# EAGLE board aspirin-teardrops (EAGLE 6.1)
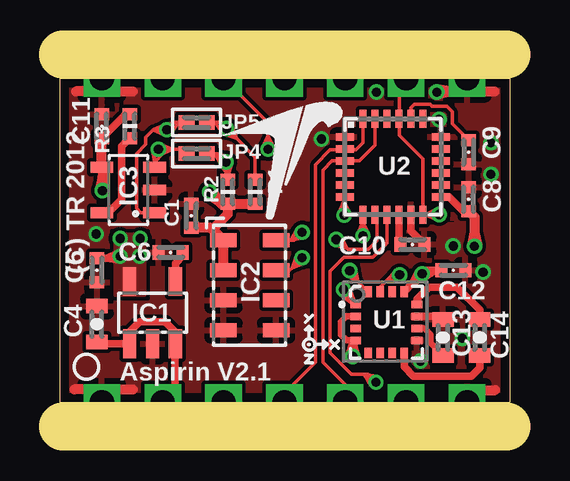
[diagram p0: board, top side]
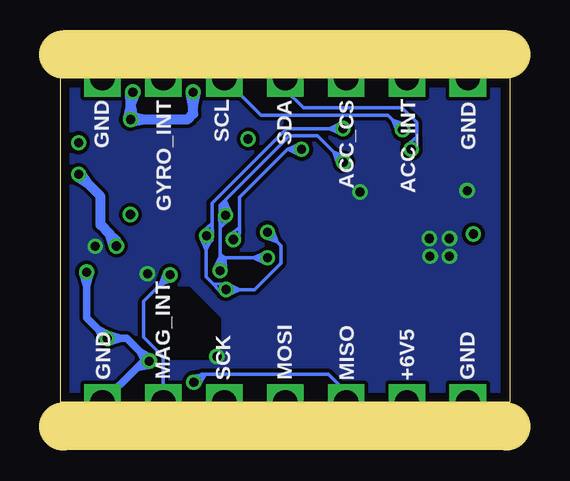
[diagram p1: board, bottom side, seen from below]

Size 18.75 x 13.5 mm. Coordinates in mm from the lower left corner, seen from the top.
Outline: 0,13.5 0,0 18.75,0 18.75,13.5 0,13.5
Copper layers (1*2+15*16): Top 0.035mm / dielectric 0.2mm / Route2 0.035mm / dielectric 1.5mm / Route15 0.035mm / dielectric 0.2mm / Bottom 0.035mm
Design rules: minimum track width 0.15mm, minimum drill 15mil, track to track 6mil, track to pad 6mil, pad to pad 6mil, via to via 6mil, smd to smd 6mil, copper to edge 15mil, drill to drill 8mil, minimum pad ring 5mil, minimum via ring 5mil, stop-mask expansion 4mil, vias tented up to drill 0.4mm, thermal gap 10mil
tRestrict: area 16.3,7.5 to 16.4,7.5; area 12.5,8.4 to 15.3,11.2; area 10,11.8 to 10,11.9; area 12.6,2.3 to 14.6,4.3
bRestrict: area 15.8,0.8 to 15.9,0.8; area 12.1,1.8 to 15,4.7
vRestrict: area 12.8,2.3 to 14.7,4.3
Milling: 2 lines

## Footprints (pad centres in the part's own frame; a part is rotated, then mirrored left to right if it is on the bottom)
ASPIRIN_CASTELLATED = drill 1.016 square: 1 0,0; 2 2.54,0; 3 5.08,0; 4 7.62,0; 5 10.16,0; 6 12.7,0; 7 15.24,0; 8 15.24,13.5; 9 12.7,13.5; 10 10.16,13.5; 11 7.62,13.5; 12 5.08,13.5; 13 2.54,13.5; 14 0,13.5
0402-CAP = smd 0.5 x 0.6: P$1 -0.5,0; P$2 0.5,0
0603-CAP = smd 0.6 x 0.9: P$1 -0.75,0; P$2 0.75,0
SOT23-5 = smd 0.55 x 1.2: 1 -0.95,-1.3; 2 0,-1.3; 3 0.95,-1.3; 4 0.95,1.3; 5 -0.95,1.3
QFN-MS5611 = smd 1.1 x 0.6: 1 -1.1,1.875; 2 -1.1,0.625; 3 -1.1,-0.625; 4 -1.1,-1.875; 5 1.1,-1.875; 6 1.1,-0.625; 7 1.1,0.625; 8 1.1,1.875
SOT23-5' = smd 0.45 x 0.95: 1 0.95,1.1; 2 0,1.1; 3 -0.95,1.1; 4 -0.95,-1.1; 5 0.95,-1.1
0402-SQJMP = smd 0.652 x 0.6: P$1 -0.424,0; P$2 0.424,0
0402-RES = smd 0.5 x 0.6: P$1 -0.5,0; P$2 0.5,0
PLCC16-HMC5883 = smd 0.45 x 0.3: 1 -1.275,0.75; 2 -1.275,0.25; 3 -1.275,-0.25; 4 -1.275,-0.75; 9 1.275,-0.75; 10 1.275,-0.25; 11 1.275,0.25; 12 1.275,0.75 | smd 0.3 x 0.45: 5 -0.75,-1.275; 6 -0.25,-1.275; 7 0.25,-1.275; 8 0.75,-1.275; 13 0.75,1.275; 14 0.25,1.275; 15 -0.25,1.275; 16 -0.75,1.275
QFN24-NO-PAD = smd 0.75 x 0.3: 1 -2,1.25; 2 -2,0.75; 3 -2,0.25; 4 -2,-0.25; 5 -2,-0.75; 6 -2,-1.25; 13 2,-1.25; 14 2,-0.75; 15 2,-0.25; 16 2,0.25; 17 2,0.75; 18 2,1.25 | smd 0.3 x 0.75: 7 -1.25,-2; 8 -0.75,-2; 9 -0.25,-2; 10 0.25,-2; 11 0.75,-2; 12 1.25,-2; 19 1.25,2; 20 0.75,2; 21 0.25,2; 22 -0.25,2; 23 -0.75,2; 24 -1.25,2

## Placement (x,y rotation side)
ASP1  ASPIRIN  [ASPIRIN_CASTELLATED]  1.74,0 0 top
C1  100n  [0402-CAP]  5.48,7.77 90 top
C4  2.2uF/Low ESR  [0603-CAP]  1.54,3.26 90 top
C5  4.7uF/10V/Low ESR  [0402-CAP]  1.54,5.49 270 top
C6  10nF  [0402-CAP]  4.62,6.25 0 top
C8  100n  [0402-CAP]  17.04,8.47 90 top
C9  2n2  [0402-CAP]  17.04,10.42 270 top
C10  100n  [0402-CAP]  14.71,6.58 0 top
C11  100n  [0402-CAP]  1.74,11.51 90 top
C12  100n  [0402-CAP]  16.41,5.5 0 top
C13  4.7uF/10V/Low ESR  [0603-CAP]  15.98,2.7 90 top
C14  220n/Low ESR  [0603-CAP]  17.5,2.7 270 top
IC1  LP2992  [SOT23-5]  3.86,3.73 0 top
IC2  MS5611  [QFN-MS5611]  7.92,4.88 0 top
IC3  >4KBIT SERIAL EEPROM HALF PROTECT  [SOT23-5']  2.85,8.85 270 top
JP4  0/DNP  [0402-SQJMP]  5.71,10.36 0 top
JP5  0/DNP  [0402-SQJMP]  5.71,11.66 0 top
R1  4k7  [0402-RES]  8.14,8.76 90 top
R2  4k7  [0402-RES]  7,8.76 90 top
R3  4k7  [0402-RES]  2.91,11.51 90 top
U1  HMC5883  [PLCC16-HMC5883]  13.61,3.33 0 top
U2  MPU-6000  [QFN24-NO-PAD]  13.88,9.8 0 top
U$1  TR-LOGO  [TR-LOGO]  9.29,10.06 0 top

## Library data of the parts
ASP1 = aspirin; PARTNO: pcb-aspirin
C1 C8 C10-C12 = pel_dipol_comp; PARTNO: cap-cer-0402-100n
C4 = pel_dipol_comp; PARTNO: cap-cer-0603-2u2
C5 = pel_dipol_comp; PARTNO: cap-cer-0402-4n7
C6 = pel_dipol_comp; PARTNO: cap-cer-0402-10n
C9 = pel_dipol_comp; PARTNO: cap-cer-0402-2n2
C13 = pel_dipol_comp; PARTNO: cap-cer-0603-4n7
C14 = pel_dipol_comp; PARTNO: cap-cer-0603-220n
IC1 = v-reg-micrel; PARTNO: vreg-sot-23-5-3v3
IC2 = aspirin; PARTNO: sensr-qfn-8-baro
IC3 = aspirin; PARTNO: ic-sot-23-5-4k-eeprom
JP4 JP5 = pel_jumpers; DNP: T; PARTNO: res-0402-0
R1-R3 = pel_dipol_comp; PARTNO: res-0402-4k7
U1 = aspirin; PARTNO: sensr-plcc-16-mag
U2 = aspirin; PARTNO: sensr-qfn-24-acc-gyro
U$1 = quadshot; BOM: EXCLUDE; PARTNO: *

## Nets
+3V3: C1.P$1 C5.P$1 C8.P$1 C11.P$1 C12.P$1 IC1.5 IC2.1 IC2.2 IC3.4 R1.P$1 R2.P$1 R3.P$2 U1.2 U1.4 U1.13 U2.13
+6V5: ASP1.2 C4.P$1 IC1.1 IC1.3
ACC_CS: ASP1.12 U2.8
GND: ASP1.1 ASP1.7 ASP1.8 ASP1.14 C1.P$2 C4.P$2 C5.P$2 C6.P$1 C8.P$2 C9.P$2 C10.P$2 C11.P$2 C12.P$2 C13.P$2 IC1.2 IC2.3 IC2.4 IC2.5 IC3.2 U1.9 U1.11 U2.1 U2.11 U2.18
GYRO_INT: ASP1.9 U2.12
MAG_INT: ASP1.6 U1.15
MISO: ASP1.3 U2.9
MOSI: ASP1.4 U2.24
N$1: C9.P$1 U2.20
N$2: C10.P$1 U2.10
N$3: C13.P$1 U1.10
N$4: IC3.5 R3.P$1
N$19: C6.P$2 IC1.4
N$34: C14.P$2 U1.8
N$48: C14.P$1 U1.12
SCK: ASP1.5 U2.23
SCL: IC2.8 JP5.P$2 R1.P$2 U1.1 U2.7
SDA: IC2.7 JP4.P$2 R2.P$2 U1.16 U2.6
XSCL: ASP1.10 IC3.1 JP5.P$1
XSDA: ASP1.11 IC3.3 JP4.P$1

## Tracks (layer width: path | path; a pad name or v marks a point on that pad's centre or on a via)
+3V3  (via drill 0.38)
  Top 0.279: U1.2 11.95,3.58 11.73,3.35 11.73,2.82 11.97,2.58 U1.4
  Top 0.305: C5.P$1 1.94,5.99 | 1.94,5.99 2.41,5.99 v2.51,6.09 | U2.13 16.23,8.55 16.82,7.97 C8.P$1 | 12.23,2.48 12.21,2.46 v12.21,1.91 | 12.23,2.48 U1.4 | 15.66,5.5 15.25,5.5 v15.1,5.36 | 15.66,5.5 C12.P$1 | U1.13 14.7,4.96 | 14.7,4.96 v15.1,5.36 | R3.P$2 2.74,12.01 C11.P$1 | 1.94,5.99 2.49,5.92 v2.51,6.09 | 1.94,5.99 2.43,6.24 v2.51,6.09 | 12.23,2.48 12.05,1.96 v12.21,1.91 | 12.23,2.48 12.37,1.95 v12.21,1.91 | 15.66,5.5 15.11,5.52 v15.1,5.36 | 15.66,5.5 15.19,5.22 v15.1,5.36 | 14.7,4.96 15.18,5.21 v15.1,5.36 | 14.7,4.96 14.96,5.44 v15.1,5.36
  Top 0.406: R2.P$1 R1.P$1 | R2.P$1 6.74,8.26 6.64,8.36 | 6.64,8.36 v6.24,8.76 | 6.36,7.21 IC2.1 IC2.2 | 6.36,7.21 6.3,7.27 C1.P$1 | R2.P$1 7,7.85 6.36,7.21 | C8.P$1 17.29,7.72 17.29,7.07 | 17.29,7.07 v17.29,6.5 | 1.77,9.39 1.77,9.78 IC3.4 C11.P$1 | 1.77,9.39 v1.77,8.82 | 1.77,9.39 1.66,8.84 v1.77,8.82 | 1.77,9.39 1.88,8.84 v1.77,8.82 | 17.29,7.07 17.18,6.53 v17.29,6.5 | 17.29,7.07 17.4,6.53 v17.29,6.5 | 6.64,8.36 6.33,8.83 v6.24,8.76 | 6.64,8.36 6.18,8.67 v6.24,8.76
  other vias: 3.32,6.09 2.51,6.83 3.35,6.83
  pour Top (no thermals): 3.52,4.46 2.3,4.46 2.3,7 3.52,7
  pour Bottom (rank 6): 0,0 18.75,0 18.75,13.5 0,13.5
+6V5
  Top 0.305: ASP1.2 4.81,0.53 IC1.3 4.81,2.94 4.39,3.35 3.33,3.35 2.91,2.94 IC1.1 1.62,2.43 C4.P$1
ACC_CS  (via drill 0.38)
  Top 0.152: v8.68,10.54 8.68,11.11 | 8.68,11.11 8.68,11.65 ASP1.12 | U2.8 13.22,7.71 13.22,6.73 12.87,6.38 12.01,6.38 11.96,6.42 | 11.96,6.42 11.6,6.78 v11.52,6.78 | 8.68,11.11 8.46,10.64 v8.68,10.54 | 8.68,11.11 8.9,10.64 v8.68,10.54 | 11.96,6.42 11.74,6.88 v11.52,6.78 | 11.96,6.42 11.46,6.55 v11.52,6.78
  Bottom 0.152: v11.52,6.78 11.27,7.04 11.27,7.29 | 11.27,7.29 11.27,8.53 9.26,10.54 9.25,10.54 | 9.25,10.54 v8.68,10.54 | 9.25,10.54 8.78,10.76 v8.68,10.54 | 9.25,10.54 8.78,10.32 v8.68,10.54 | 11.27,7.29 11.28,6.78 v11.52,6.78 | 11.27,7.29 11.67,6.97 v11.52,6.78
GND  (via drill 0.38)
  Top 0.152: ASP1.14 1.74,13.49
  Top 0.305: C13.P$2 15.85,3.58 U1.11 | U2.11 14.63,7.15 C10.P$2
  Top 0.406: 16.98,13.49 ASP1.8 | 0.6,0.53 1.21,0.53 ASP1.1 2.28,0.53 3.04,0.53 | 3.04,12.95 2.28,12.95 1.74,13.49 1.21,12.95 0.68,12.95 | 18.13,12.95 17.52,12.95 16.98,13.49 | 16.28,12.95 16.45,12.95 16.98,13.49 | 16.28,12.95 15.69,12.95 | 18.15,0.51 17.52,0.51 16.98,-0.03 | 16.28,12.95 15.73,13.04 v15.71,12.92 15.74,12.81 16.28,12.95
  Bottom 0.305: 15.53,1.45 15.27,1.72 v15.03,1.72 | 15.53,1.45 ASP1.7 | v15.03,1.72 15.43,2.12 | 15.43,2.12 15.97,2.66 16.21,2.66 | 16.21,2.66 v16.78,2.66 | v16.78,2.66 17.19,3.07 | 17.19,3.07 17.64,3.52 17.64,4.85 | 17.64,4.85 v17.64,5.42 | 17.64,4.85 17.8,5.38 v17.64,5.42 | 17.64,4.85 17.49,5.38 v17.64,5.42 | 16.21,2.66 16.73,2.5 v16.78,2.66 | 16.21,2.66 16.73,2.82 v16.78,2.66 | 17.19,3.07 16.7,2.81 v16.78,2.66 | 17.19,3.07 16.93,2.58 v16.78,2.66 | 15.53,1.45 15.14,1.83 v15.03,1.72 | 15.53,1.45 15,1.55 v15.03,1.72 | 15.43,2.12 14.95,1.86 v15.03,1.72 | 15.43,2.12 15.17,1.64 v15.03,1.72
  Bottom 0.406: v15.81,11.78 15.81,12.35 | 15.81,12.35 15.81,12.36 | 15.81,12.36 15.81,12.83 v15.71,12.92 | v16.4,6.51 16.4,6.73 16.68,7.01 | 16.68,7.01 17.06,7.39 17.06,8.59 17.57,9.1 | 17.57,9.1 v17.97,9.5 | 15.24,11.78 13.43,11.78 13.2,12.01 13.2,12.35 | 15.24,11.78 v15.81,11.78 | 13.2,12.35 v13.2,12.92 | 17.57,9.1 18.04,9.4 v17.97,9.5 | 17.57,9.1 17.88,9.56 v17.97,9.5 | 16.68,7.01 16.31,6.58 v16.4,6.51 | 16.68,7.01 16.51,6.47 v16.4,6.51 | 15.81,12.36 15.83,12.92 v15.71,12.92 | 15.81,12.36 15.61,12.88 v15.71,12.92 | 15.81,12.35 15.7,11.8 v15.81,11.78 | 15.81,12.35 15.92,11.8 v15.81,11.78 | 15.24,11.78 15.79,11.67 v15.81,11.78 | 15.24,11.78 15.79,11.89 v15.81,11.78 | 13.2,12.35 13.31,12.9 v13.2,12.92 | 13.2,12.35 13.09,12.9 v13.2,12.92
  other vias: 17.97,10.81 10.91,10.97 1.51,7.01
  pour Top (rank 6): 0,0 18.75,0 18.75,13.5 0,13.5
GYRO_INT  (via drill 0.38)
  Top 0.152: 15.24,7.8 U2.12 15.13,10.15 14.16,11.12 14.16,13.22 ASP1.9 | 15.24,7.8 15.8,7.8 v15.82,7.82 | 15.24,7.8 15.72,7.6 v15.82,7.82 | 15.24,7.8 15.71,8.04 v15.82,7.82
MAG_INT  (via drill 0.38)
  Top 0.152: U1.15 13.36,4.8 13.63,5.08 13.64,5.08 | 13.64,5.08 13.94,5.08 v14.16,5.31 | 13.64,5.08 14.16,5.07 v14.16,5.31 | 13.64,5.08 13.98,5.47 v14.16,5.31
  Bottom 0.152: 14.57,4.9 15.26,4.22 15.26,2.72 14.44,1.91 ASP1.6 | 14.57,4.9 v14.16,5.31 | 14.57,4.9 14.39,5.39 v14.16,5.31 | 14.57,4.9 14.08,5.08 v14.16,5.31
MISO  (via drill 0.38)
  Top 0.152: U2.9 13.63,6.63 13.05,6.04 11.85,6.04 11.27,5.46 11.27,2.06 12.16,1.17 12.71,1.17 | v13.17,0.84 12.84,1.17 12.71,1.17 | 12.71,1.17 12.96,0.72 v13.17,0.84 | 12.71,1.17 13.22,1.08 v13.17,0.84
  Bottom 0.152: 12.71,1.17 7.56,1.17 6.82,0.43 ASP1.3 | 12.71,1.17 12.84,1.17 v13.17,0.84 | 12.71,1.17 12.96,0.72 v13.17,0.84 | 12.71,1.17 13.22,1.08 v13.17,0.84
MOSI
  Top 0.152: U2.24 12.64,10.82 12.34,10.52 11.27,10.52 10.66,9.91 10.66,1.68 9.36,0.38 ASP1.4
N$1
  Top 0.152: C9.P$1 16.36,11.61 16.36,12.12 16.13,12.34 15.52,12.34 15.44,12.42 14.78,12.42 14.63,12.27 U2.20
N$2
  Top 0.305: U2.10 14.13,6.65 C10.P$1
N$3
  Top 0.254: C13.P$1 15.46,2.47 15.46,2.82 15.2,3.08 U1.10
N$4
  Top 0.305: R3.P$1 2.58,10.68 2.58,8.46 2.02,7.9 IC3.5
N$19
  Top 0.305: C6.P$2 5.12,6.1 4.82,5.79 IC1.4
N$34
  Top 0.305: C14.P$2 17.5,1.43 17.16,1.09 14.75,1.09 14.36,1.49 U1.8
N$48
  Top 0.305: C14.P$1 17.5,3.85 16.55,4.8 15.38,4.8 14.88,4.3 U1.12
SCK
  Top 0.152: U2.23 13.13,10.71 12.49,10.06 11.34,10.06 10.96,9.68 10.96,1.68 11.9,0.74 ASP1.5
SCL  (via drill 0.38)
  Top 0.152: U2.7 12.64,7.51 | v12.64,6.93 12.64,7.51 | 6.44,11.66 6.7,11.66 v6.95,11.4 | 6.44,11.66 JP5.P$2 | R1.P$2 8.14,10.21 7.35,11 | v6.95,11.4 7.35,11 | IC2.8 9.64,6.75 | 9.64,6.75 9.77,6.75 v10.1,7.09 | 12.64,7.51 12.42,7.04 v12.64,6.93 | 12.64,7.51 12.86,7.04 v12.64,6.93 | 6.44,11.66 6.76,11.25 v6.95,11.4 | 6.44,11.66 6.96,11.65 v6.95,11.4 | 7.35,11 7.18,11.49 v6.95,11.4 | 7.35,11 6.87,11.18 v6.95,11.4 | 9.64,6.75 10.15,6.85 v10.1,7.09 | 9.64,6.75 9.89,7.2 v10.1,7.09
  Top 0.305: 12.17,4.24 11.83,4.58 v11.83,4.7 | 12.17,4.24 U1.1 | 12.17,4.24 11.98,4.75 v11.83,4.7 | 12.17,4.24 11.73,4.57 v11.83,4.7
  Bottom 0.152: 12.67,6.36 12.67,5.23 12.35,4.92 | 12.67,6.36 12.67,6.51 12.42,6.76 | 12.42,6.76 12.46,6.76 v12.64,6.93 | 12.35,4.92 12.13,4.7 v11.83,4.7 | 12.42,6.76 12.42,7.46 | 12.42,7.46 12.42,8.3 9.31,11.4 7.52,11.4 | 7.52,11.4 v6.95,11.4 | v10.1,7.09 9.7,6.68 | 9.7,6.68 9.54,6.53 9.54,5.79 10.63,4.7 11.26,4.7 | 11.26,4.7 v11.83,4.7 | 12.35,4.92 11.84,4.94 v11.83,4.7 | 12.35,4.92 12.01,4.54 v11.83,4.7 | 11.26,4.7 11.73,4.48 v11.83,4.7 | 11.26,4.7 11.73,4.92 v11.83,4.7 | 12.67,6.36 12.86,6.84 v12.64,6.93 | 12.67,6.36 12.43,6.82 v12.64,6.93 | 12.42,7.46 12.4,6.94 v12.64,6.93 | 12.42,7.46 12.8,7.11 v12.64,6.93 | 7.52,11.4 7.05,11.62 v6.95,11.4 | 7.52,11.4 7.05,11.19 v6.95,11.4 | 9.7,6.68 10.18,6.86 v10.1,7.09 | 9.7,6.68 9.87,7.17 v10.1,7.09
SDA  (via drill 0.38)
  Top 0.152: U2.6 11.85,8.52 11.85,8.37 | v11.85,7.8 11.85,8.37 | 6.48,10.36 6.57,10.36 v6.93,10.01 | 6.48,10.36 JP4.P$2 | 7,9.44 7,9.93 v6.93,10.01 | 7,9.44 R2.P$2 | IC2.7 9.58,5.5 9.7,5.62 | 9.7,5.62 v10.1,6.02 | 12.43,5.03 12.08,5.38 v12.08,5.49 | 12.43,5.03 U1.16 | 12.43,5.03 12.32,5.54 v12.08,5.49 | 12.43,5.03 11.97,5.27 v12.08,5.49 | 11.85,8.37 11.63,7.9 v11.85,7.8 | 11.85,8.37 12.07,7.9 v11.85,7.8 | 6.48,10.36 6.71,9.9 v6.93,10.01 | 6.48,10.36 6.98,10.24 v6.93,10.01 | 7,9.44 7.16,9.94 v6.93,10.01 | 7,9.44 6.72,9.88 v6.93,10.01 | 9.7,5.62 10.18,5.79 v10.1,6.02 | 9.7,5.62 9.87,6.1 v10.1,6.02
  Bottom 0.152: 12.08,5.99 12.08,6.06 | 12.08,6.06 12.08,7.27 | 12.08,7.27 12.08,8.2 11.93,8.36 | 12.08,5.87 12.08,5.99 | 12.08,5.87 v12.08,5.49 | 11.93,8.36 11.92,8.37 | 11.92,8.37 11.85,8.43 | 11.85,8.43 11.85,8.37 | 11.85,8.37 v11.85,7.8 | 7.33,10.41 8.02,11.1 9.19,11.1 11.85,8.43 | 7.33,10.41 v6.93,10.01 | v11.85,7.8 11.95,7.7 | v10.1,6.02 10.67,6.02 | 10.67,6.02 11.88,6.02 | 11.88,6.02 11.9,6.02 | 11.9,6.02 11.92,6.03 | 11.92,6.03 12.06,6.17 | 11.9,6.02 11.93,6.02 | 11.93,6.02 12.06,6.02 12.08,5.99 | 11.93,6.02 12.08,5.87 | 11.93,8.36 11.93,7.72 | 12.08,6.06 11.86,5.59 v12.08,5.49 | 12.08,6.06 12.3,5.59 v12.08,5.49 | 11.88,6.02 11.84,5.5 v12.08,5.49 | 11.88,6.02 12.25,5.66 v12.08,5.49 | 11.92,6.03 11.84,5.52 v12.08,5.49 | 11.92,6.03 12.26,5.65 v12.08,5.49 | 12.08,7.27 12.09,7.79 v11.85,7.8 | 12.08,7.27 11.69,7.62 v11.85,7.8 | 11.92,8.37 11.65,7.92 v11.85,7.8 | 11.92,8.37 12.08,7.87 v11.85,7.8 | 11.85,8.37 11.63,7.9 v11.85,7.8 | 11.85,8.37 12.07,7.9 v11.85,7.8 | 7.33,10.41 6.84,10.23 v6.93,10.01 | 7.33,10.41 7.15,9.93 v6.93,10.01 | 10.67,6.02 10.2,6.24 v10.1,6.02 | 10.67,6.02 10.2,5.8 v10.1,6.02
XSCL  (via drill 0.38)
  Top 0.152: 3.89,11.35 3.88,11.35 3.57,11.05 3.57,10.74 3.19,10.36 3.19,8.08 3.37,7.9 IC3.1 | 3.89,11.35 v4.46,11.35 | 4.94,11.66 4.77,11.66 v4.46,11.35 | 4.94,11.66 JP5.P$1 | 3.89,11.35 4.36,11.13 v4.46,11.35 | 3.89,11.35 4.36,11.57 v4.46,11.35 | 4.94,11.66 4.43,11.59 v4.46,11.35 | 4.94,11.66 4.66,11.22 v4.46,11.35
  Bottom 0.152: v4.46,11.35 4.87,11.76 | 4.87,11.76 5.07,11.96 10.37,11.96 ASP1.10 | 4.87,11.76 4.38,11.58 v4.46,11.35 | 4.87,11.76 4.69,11.27 v4.46,11.35
XSDA  (via drill 0.38)
  Top 0.152: JP4.P$1 5.1,10.54 4.68,10.54 | v4.11,10.54 4.68,10.54 | IC3.3 3.95,9.99 | 3.95,9.99 3.95,10.39 v4.11,10.54 | 4.68,10.54 4.21,10.76 v4.11,10.54 | 4.68,10.54 4.21,10.32 v4.11,10.54 | 3.95,9.99 4.29,10.38 v4.11,10.54 | 3.95,9.99 3.87,10.5 v4.11,10.54
  Bottom 0.152: ASP1.11 9.36,13.03 8.6,12.27 4.49,12.27 3.88,11.66 3.88,11.06 | 3.88,11.06 3.88,10.77 v4.11,10.54 | 3.88,11.06 3.86,10.55 v4.11,10.54 | 3.88,11.06 4.27,10.72 v4.11,10.54

## Text on the board
tPlace: (C) TR 2012 | Aspirin V2.1
bPlace: GND | ACC_INT | ACC_CS | SDA | SCL | GYRO_INT | GND | GND | +6V5 | MISO | MOSI | SCK | MAG_INT | GND
Reference: (C) 2010-2011 Antoine Drouin <poinix@gmail.com> | Licensed under: | (C) 2010-2012 Piotr Esden-Tempski <piotr@esden.net> | (C) 2011 Joby Robotics <info@jobyrobotics.com> | (C) 2011 Richard Hatano <rhatano@jobyenergy.com> | CC-BY-SA 3.0 | (C) 2011-2012 Transition Robotics <info@transition-robotics.com> | http://creativecommons.org/licenses/by-sa/3.0/